# EAGLE board mrShark 09 (EAGLE 6.3)
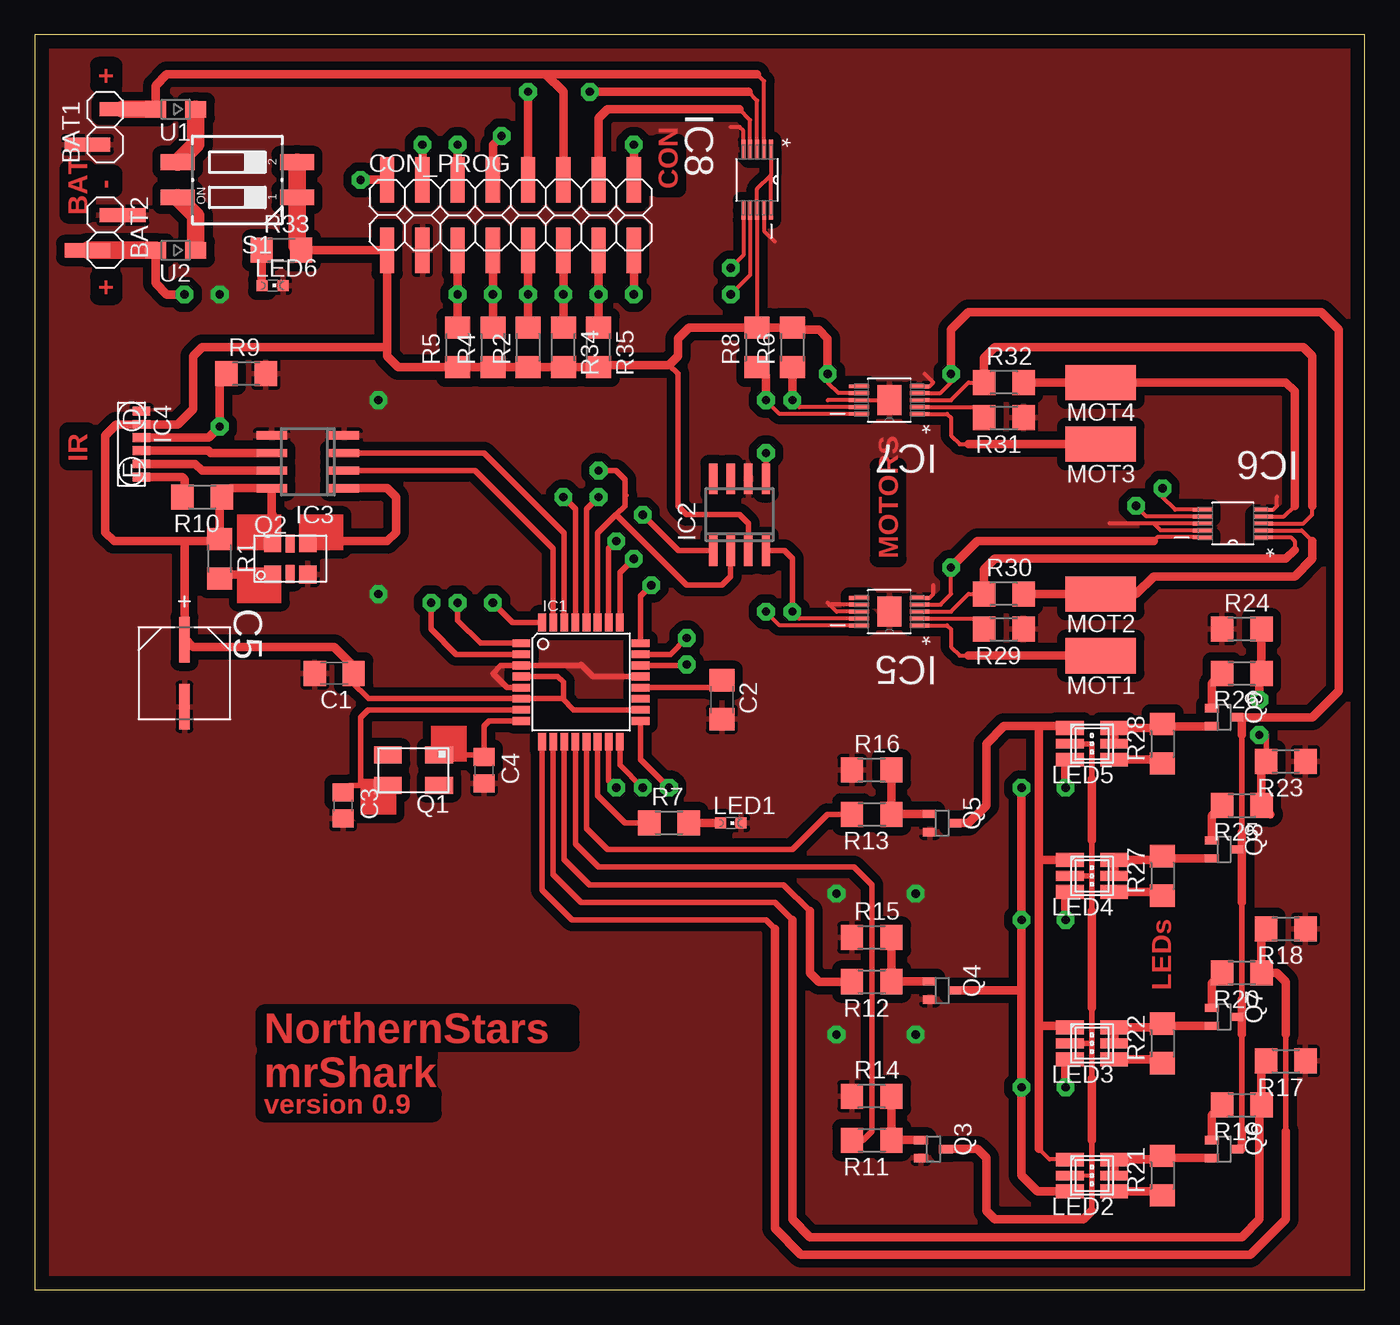
[diagram p0: board, top side]
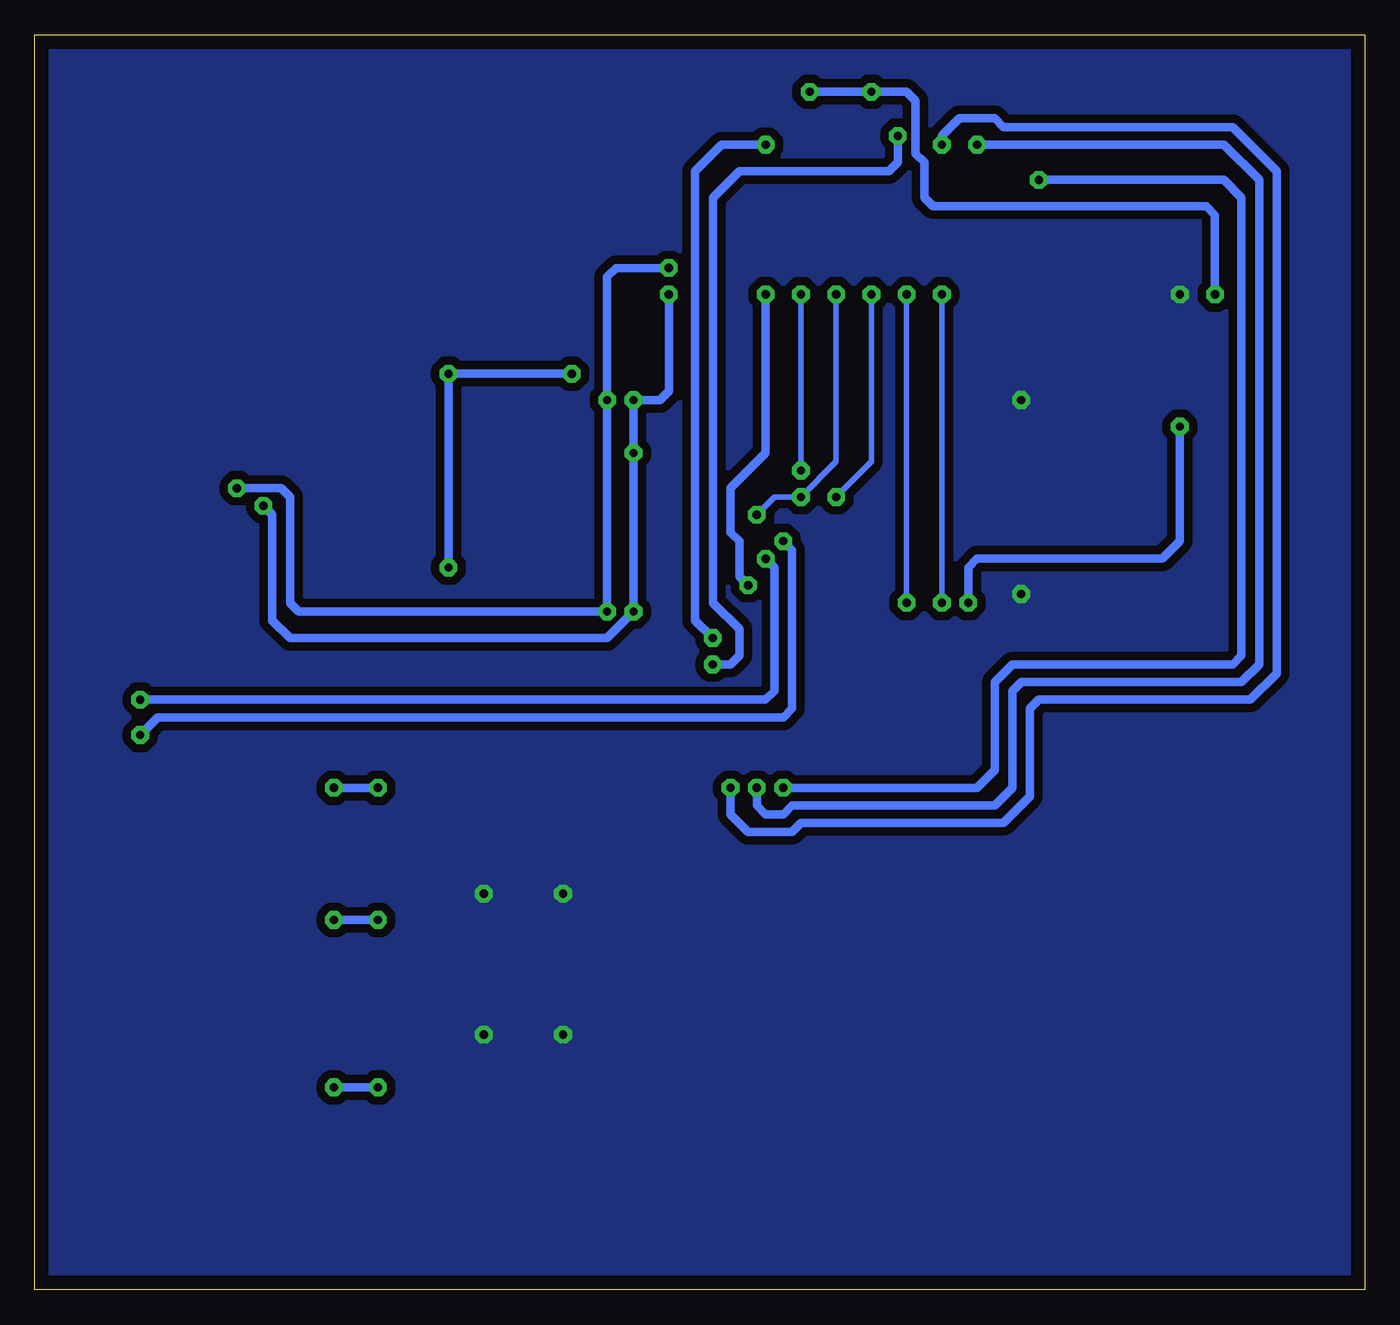
[diagram p1: board, bottom side, seen from below]

Size 95.86 x 90.47 mm. Coordinates in mm from the lower left corner, seen from the top.
Outline: 0,0 95.86,0 95.86,90.47 0,90.47 0,0
Copper layers (1*16): Top 0.035mm / dielectric 1.5mm / Bottom 0.035mm
Design rules "default": minimum track width 10mil, minimum drill 24mil, track to track 1mil, track to pad 1mil, pad to pad 1mil, via to via 1mil, smd to smd 1mil, copper to edge 40mil, drill to drill 8mil, minimum pad ring 10mil, minimum via ring 8mil, stop-mask expansion 4mil, vias tented up to drill 0mil, thermal gap 10mil

## Footprints (pad centres in the part's own frame; a part is rotated, then mirrored left to right if it is on the bottom)
1X02SMD = smd 1.016 x 3.302: 1 -1.27,1.27; 2 1.27,-1.27
C1206 = smd 1.6 x 1.8: 1 -1.4,0; 2 1.4,0
C0805 = smd 1.3 x 1.5: 1 -0.95,0; 2 0.95,0
CAPAE660X800N = smd 3.251 x 0.762: 1 -2.413,0; 2 2.413,0
2X08SMD = smd 1.016 x 3.302: 1 -1.27,-3.81; 2 -1.27,1.27; 3 1.27,-3.81; 4 1.27,1.27; 5 3.81,-3.81; 6 3.81,1.27; 7 6.35,-3.81; 8 6.35,1.27; 9 8.89,-3.81; 10 8.89,1.27; 11 11.43,-3.81; 12 11.43,1.27; 13 13.97,-3.81; 14 13.97,1.27; 15 16.51,-3.81; 16 16.51,1.27
TQFP32-08 = smd 1.27 x 0.559: 1 -4.293,2.8; 2 -4.293,2; 3 -4.293,1.2; 4 -4.293,0.4; 5 -4.293,-0.4; 6 -4.293,-1.2; 7 -4.293,-2; 8 -4.293,-2.8; 17 4.293,-2.8; 18 4.293,-2; 19 4.293,-1.2; 20 4.293,-0.4; 21 4.293,0.4; 22 4.293,1.2; 23 4.293,2; 24 4.293,2.8 | smd 0.559 x 1.27: 9 -2.8,-4.293; 10 -2,-4.293; 11 -1.2,-4.293; 12 -0.4,-4.293; 13 0.4,-4.293; 14 1.2,-4.293; 15 2,-4.293; 16 2.8,-4.293; 25 2.8,4.293; 26 2,4.293; 27 1.2,4.293; 28 0.4,4.293; 29 -0.4,4.293; 30 -1.2,4.293; 31 -2,4.293; 32 -2.8,4.293
SO8 = smd 0.6 x 2.2: 1 -1.905,-2.6; 2 -0.635,-2.6; 3 0.635,-2.6; 4 1.905,-2.6; 5 1.905,2.6; 6 0.635,2.6; 7 -0.635,2.6; 8 -1.905,2.6
SO-08 = smd 0.6 x 2.2: 1 -1.905,-2.6; 2 -0.635,-2.6; 3 0.635,-2.6; 4 1.905,-2.6; 5 1.905,2.6; 6 0.635,2.6; 7 -0.635,2.6; 8 -1.905,2.6
TFBS4711 = smd 0.635 x 1.27: 1 2.37,0.72; 2 1.42,0.72; 3 0.47,0.72; 4 -0.48,0.72; 5 -1.43,0.72; 6 -2.38,0.72
SOP65P640X110-15N = smd 1.422 x 0.279: 1 -2.184,0.991; 2 -2.184,0.508; 3 -2.184,0; 4 -2.184,-0.508; 5 -2.184,-0.991; 6 2.184,-0.991; 7 2.184,-0.508; 8 2.184,0; 9 2.184,0.508; 10 2.184,0.991 | smd 1.727 x 2.184: 11 0,0
SOP50P490X110-10N = smd 1.397 x 0.279: 1 -2.184,0.991; 2 -2.184,0.508; 3 -2.184,0; 4 -2.184,-0.508; 5 -2.184,-0.991; 6 2.184,-0.991; 7 2.184,-0.508; 8 2.184,0; 9 2.184,0.508; 10 2.184,0.991
CHIPLED_0603 = smd 0.8 x 0.8: A 0,-0.75; C 0,0.75
PLCC6K = smd 2 x 1: 1 1.6,-1.15; 3 1.6,1.15; 4 -1.6,1.15; 6 -1.6,-1.15 | smd 2 x 0.7: 2 1.6,0; 5 -1.6,0
SMD2,54-5,08 = smd 2.54 x 5.08: 1 0,0
TXC_7B_SERIES = smd 2 x 1.2: 1 -1.85,-1.1; 2 1.85,-1.1; 3 1.85,1.1; 4 -1.85,1.1
HC536 = smd 1.24 x 1.29: 1 -1.27,-1.125; 2 1.27,-1.125; 3 1.27,1.125; 4 -1.27,1.125 | smd 0.64 x 1.29: TP1 0,1.1; TP2 0,-1.1
SOT323-BEC = smd 0.6 x 1: B -0.65,-0.9; C 0,0.9; E 0.65,-0.9
R1206 = smd 1.6 x 1.803: 1 -1.422,0; 2 1.422,0
CTS-219-02 = smd 1.13 x 2.44: 1 -1.27,-4.3; 2 1.27,-4.3; 3 1.27,4.3; 4 -1.27,4.3
SOD323-W = smd 1.5 x 1.2: A 1.45,0; C -1.45,0

## Placement (x,y rotation side)
BAT1  [1X02SMD]  5.08,83.82 90 top
BAT2  [1X02SMD]  5.08,76.2 270 top
C1  100n  [C1206]  21.59,44.45 180 top
C2  100n  [C1206]  49.53,42.55 270 top
C3  18p  [C0805]  22.23,34.92 270 top
C4  18p  [C0805]  32.38,37.47 270 top
C5  220UF  [CAPAE660X800N]  10.79,44.45 270 top
CON_PROG  7852-16-00-00  [2X08SMD]  26.67,78.74 0 top
IC1  ATMEGA168V-10MU  [TQFP32-08]  39.37,43.81 0 top
IC2  PCA9540SO8  [SO8]  50.8,55.88 0 top
IC3  TIR1000PSR  [SO-08]  19.68,59.69 90 top
IC4  TFBS4711TR1  [TFBS4711]  6.99,60.96 270 top
IC5  DRV8830DRCT  [SOP65P640X110-15N]  61.59,48.9 180 top
IC6  LTC2990IMS#PBF  [SOP50P490X110-10N]  86.36,55.24 180 top
IC7  DRV8830DRCT  [SOP65P640X110-15N]  61.59,64.14 180 top
IC8  LTC2990IMS#PBF  [SOP50P490X110-10N]  52.07,80.01 270 top
LED1  green  [CHIPLED_0603]  50.16,33.66 270 top
LED2  ASMT-YTD2-0BB02  [PLCC6K]  76.2,8.26 180 top
LED3  ASMT-YTD2-0BB02  [PLCC6K]  76.2,17.78 180 top
LED4  ASMT-YTD2-0BB02  [PLCC6K]  76.2,29.84 180 top
LED5  ASMT-YTD2-0BB02  [PLCC6K]  76.2,39.37 180 top
LED6  red  [CHIPLED_0603]  17.14,72.39 270 top
MOT1  [SMD2,54-5,08]  76.83,45.72 90 top
MOT2  [SMD2,54-5,08]  76.83,50.16 90 top
MOT3  [SMD2,54-5,08]  76.83,60.96 90 top
MOT4  [SMD2,54-5,08]  76.83,65.41 90 top
Q1  TXC-7B-SERIESSMD  [TXC_7B_SERIES]  27.3,37.47 180 top
Q2  FXO-HC536R-1.8432  [HC536]  18.41,52.7 0 top
Q3  BC817W  [SOT323-BEC]  64.77,10.16 270 top
Q4  BC817W  [SOT323-BEC]  65.41,21.59 270 top
Q5  BC817W  [SOT323-BEC]  65.41,33.66 270 top
Q6  BC817W  [SOT323-BEC]  85.72,10.16 270 top
Q7  BC817W  [SOT323-BEC]  85.72,19.68 270 top
Q8  BC817W  [SOT323-BEC]  85.72,31.75 270 top
Q9  BC817W  [SOT323-BEC]  85.72,41.27 270 top
R1  100k  [R1206]  13.34,52.7 270 top
R2  100k  [R1206]  35.56,67.94 90 top
R4  100k  [R1206]  33.02,67.94 90 top
R5  100k  [R1206]  30.48,67.94 90 top
R6  1k8  [R1206]  54.61,67.94 90 top
R7  130R  [R1206]  45.72,33.66 0 top
R8  1k8  [R1206]  52.07,67.94 90 top
R9  100k  [R1206]  15.24,66.04 0 top
R10  27R  [R1206]  12.06,57.15 180 top
R11  1k  [R1206]  60.33,10.79 180 top
R12  1k  [R1206]  60.33,22.23 180 top
R13  1k  [R1206]  60.33,34.29 180 top
R14  100k  [R1206]  60.33,13.97 0 top
R15  100k  [R1206]  60.33,25.4 0 top
R16  100k  [R1206]  60.33,37.47 0 top
R17  100k  [R1206]  90.17,16.51 180 top
R18  100k  [R1206]  90.17,26.04 180 top
R19  1k  [R1206]  87,13.34 180 top
R20  1k  [R1206]  87,22.86 180 top
R21  82R  [R1206]  81.28,8.26 90 top
R22  82R  [R1206]  81.28,17.78 90 top
R23  100k  [R1206]  90.17,38.1 180 top
R24  100k  [R1206]  87,47.62 0 top
R25  1k  [R1206]  87,34.92 180 top
R26  1k  [R1206]  87,44.45 180 top
R27  82R  [R1206]  81.28,29.84 90 top
R28  82R  [R1206]  81.28,39.37 90 top
R29  0.95R  [R1206]  69.85,47.62 180 top
R30  0R2  [R1206]  69.85,50.16 0 top
R31  0.95R  [R1206]  69.85,62.87 180 top
R32  0R2  [R1206]  69.85,65.41 0 top
R33  130R  [R1206]  17.78,74.93 0 top
R34  1k8  [R1206]  38.1,67.94 270 top
R35  1k8  [R1206]  40.64,67.94 270 top
S1  219-02  [CTS-219-02]  14.61,80.01 90 top
U1  PMEG2010EAW  [SOD323-W]  10.16,85.09 180 top
U2  PMEG2010EAW  [SOD323-W]  10.16,74.93 180 top

## Library data of the parts
BAT1 BAT2 CON_PROG = pinhead-2
C1-C4 R1 R2 R4-R35 = rcl
C5 = Panasonic-EEEFK_EEEFP; MPN: EEE-FK1C221XP; OC_FARNELL: 1850103; OC_NEWARK: 23T0845; PACKAGE: CASE-D8; SUPPLIER: PANASONIC; TOLERANCE: ±20 %; VOLTAGERATING: 16V
IC1 = atmega8
IC2 = nxp
IC3 = texas
IC4 = vishay
IC5 IC7 = texas; MPN: DRV8830DGQR; OC_FARNELL: 1863106; OC_NEWARK: 58T1482; PACKAGE: MSOP-10; SUPPLIER: TEXAS INSTRUMENTS
IC6 IC8 = linear-technology; DESCRIPTION: I2C Temperature, Voltage and Current Monitor; MPN: LTC2990IMS#PBF; OC_FARNELL: 1898629; OC_NEWARK: 13T3889; PACKAGE: MSOP-10; SUPPLIER: Linear Technology
LED1-LED6 = led
MOT1-MOT4 = wirepad
Q1 Q2 = crystal
Q3-Q9 = transistor-npn
S1 = switch-dil
U1 U2 = diode

## Nets
ADC7: CON_PROG.8 IC1.22
BAT1+: BAT1.2 CON_PROG.12 IC8.2 U1.A
BAT2+: BAT2.2 CON_PROG.10 IC8.3 U2.A
CLK: IC3.1 Q2.3
COLOR_B: LED2.1 LED3.1 LED4.1 LED5.1 Q5.C
COLOR_G: LED2.2 LED3.2 LED4.2 LED5.2 Q3.C
COLOR_R: LED2.3 LED3.3 LED4.3 LED5.3 Q4.C
GND: BAT1.1 BAT2.1 C1.2 C2.2 C3.2 C4.2 C5.2 CON_PROG.3 IC1.3 IC1.5 IC1.21 IC2.6 IC3.4 IC3.5 IC4.6 IC5.5 IC5.7 IC5.8 IC5.11 IC6.5 IC6.8 IC6.9 IC7.5 IC7.8 IC7.11 IC8.5 IC8.9 LED1.C LED6.C Q2.2 Q3.E Q4.E Q5.E R9.2 R14.1 R15.1 R16.1 R17.1 R18.1 R23.1 R24.1 R29.1 R31.1
I2C_ADC: CON_PROG.14 IC8.4
INT0: CON_PROG.7 IC1.32 R4.2
INT1: CON_PROG.5 IC1.1 R5.2
IR_SD: IC1.2 IC4.4 R9.1
IRDA: IC4.1 R10.2
LED1: IC1.10 R17.2 R19.1
LED2: IC1.9 R18.2 R20.1
LED3: IC1.26 R23.2 R25.1
LED4: IC1.25 R24.2 R26.1
LED_B: IC1.13 R13.2
LED_G: IC1.12 R11.2
LED_R: IC1.11 R12.2
MISO: CON_PROG.4 IC1.16
MOSI: CON_PROG.2 IC1.15
N$1: IC5.1 MOT1.1
N$2: IC5.2 R29.2
N$3: IC1.14 R7.1
N$4: Q2.1 R1.2
N$5: LED2.4 R21.1
N$6: IC7.1 MOT3.1
N$7: IC7.2 R31.2
N$8: LED1.A R7.2
N$9: S1.3 U1.C
N$10: LED4.4 R27.1
N$11: LED4.5 LED4.6 Q8.E R27.2
N$12: S1.4 U2.C
N$13: C3.1 IC1.7 Q1.3
N$14: C4.1 IC1.8 Q1.1
N$15: LED3.4 R22.1
N$16: LED3.5 LED3.6 Q7.E R22.2
N$19: Q7.B R20.2
N$20: LED5.4 R28.1
N$22: LED5.5 LED5.6 Q9.E R28.2
N$23: Q9.B R26.2
N$24: Q8.B R25.2
N$25: Q6.B R19.2
N$26: C2.1 IC1.20
N$27: LED2.5 LED2.6 Q6.E R21.2
N$28: LED6.A R33.1
RESET: CON_PROG.9 IC1.29 R2.2
RSCL: CON_PROG.11 IC1.28 IC2.1 R34.1
RSDA: CON_PROG.13 IC1.27 IC2.2 R35.1
RXD: IC1.30 IC3.3
RXIR: IC3.6 IC4.3
SCK: CON_PROG.6 IC1.17
SCL: IC2.5 IC5.10 IC6.7 IC7.10 IC8.7 R8.1
SDA: IC2.4 IC5.9 IC6.6 IC7.9 IC8.6 R6.1
SENS_MOTL1: IC5.3 IC6.1 R30.1
SENS_MOTL2: IC6.2 MOT2.1 R30.2
SENS_MOTR1: IC6.3 IC7.3 R32.1
SENS_MOTR2: IC6.4 MOT4.1 R32.2
SRXD: CON_PROG.16 IC1.23
STXD: CON_PROG.15 IC1.24
TXD: IC1.31 IC3.2
TXIR: IC3.7 IC4.2
VCC: C1.1 C5.1 CON_PROG.1 IC1.4 IC1.6 IC1.18 IC2.3 IC3.8 IC4.5 IC5.4 IC6.10 IC7.4 IC7.7 IC8.1 IC8.8 IC8.10 Q2.4 Q6.C Q7.C Q8.C Q9.C R1.1 R2.1 R4.1 R5.1 R6.2 R8.2 R10.1 R33.2 R34.2 R35.2 S1.1 S1.2
X1: Q5.B R13.1 R16.2
X2: Q4.B R12.1 R15.2
X3: Q3.B R11.1 R14.2

## Tracks (layer width: path | path; a pad name or v marks a point on that pad's centre or on a via)
ADC7  (via drill 0.6 pad 1.27)
  Top 0.406: IC1.22 46.92,45.02 v46.99,45.09
  Top 0.61: CON_PROG.8 33.02,82.55 v33.66,83.19
  Bottom 0.61: v33.66,83.19 33.66,81.28 34.29,80.64 45.09,80.64 46.99,78.74 46.99,49.53 45.09,47.62 45.09,45.72 45.72,45.09 v46.99,45.09
BAT1+
  Top 0.305: IC8.2 52.58,87.12 52.07,87.63
  Top 0.61: U1.A 8.71,86.81 9.53,87.63 36.83,87.63 | 36.83,87.63 38.1,86.36 CON_PROG.12 | 52.07,87.63 36.83,87.63
  Top 1.27: BAT1.2 U1.A
BAT2+  (via drill 0.6 pad 1.27)
  Top 0.305: IC8.3 52.07,85.72 51.44,86.36
  Top 0.61: 51.44,86.36 v40.01,86.36 | v35.56,86.36 CON_PROG.10 | U2.A 8.71,72.57 9.53,71.75 v10.79,71.75
  Top 1.27: U2.A BAT2.2
  Bottom 0.61: v10.79,71.75 10.79,77.47 11.43,78.11 31.11,78.11 31.75,78.74 31.75,81.28 32.38,81.92 32.38,85.72 33.02,86.36 v35.56,86.36 v40.01,86.36
CLK
  Top 0.61: IC3.1 25.4,57.78 26.04,57.15 26.04,54.61 25.4,53.98 19.83,53.98 Q2.3
COLOR_B
  Top 0.305: LED2.1 73.14,9.4 72.39,10.16 | 74.48,19.05 LED3.1 | 74.48,40.64 LED5.1
  Top 0.61: Q5.C 67.31,33.66 68.58,34.92 68.58,39.37 69.85,40.64 72.39,40.64 | 72.39,10.16 72.39,19.05 | 72.39,19.05 72.39,31.11 | 72.39,31.11 72.39,40.64 | LED4.1 72.51,31 72.39,31.11 | 74.48,19.05 72.39,19.05 | 74.48,40.64 72.39,40.64
COLOR_G
  Top 0.305: LED2.2 76.2,8.26
  Top 0.406: 76.2,5.71 76.2,8.26 76.2,10.79 | LED3.2 76.2,17.78 | 76.2,17.78 76.2,15.24 | LED4.2 76.2,29.84 | 76.2,29.84 76.2,27.3 | 76.2,20.32 76.2,17.78 | LED5.2 76.2,39.37 76.2,36.83 | 76.2,32.38 76.2,29.84
  Top 0.61: Q3.C 67.94,10.16 68.58,9.53 68.58,5.71 69.22,5.08 75.56,5.08 76.2,5.71 | 76.2,15.24 76.2,10.79 | 76.2,27.3 76.2,20.32 | 76.2,36.83 76.2,32.38
COLOR_R  (via drill 0.6 pad 1.27)
  Top 0.61: LED2.3 72.27,7.11 71.12,8.26 v71.12,14.61 71.12,21.59 | 71.12,21.59 v71.12,26.67 v71.12,36.2 | v74.3,36.2 74.3,37.91 LED5.3 | LED4.3 74.3,28.39 v74.3,26.67 | LED3.3 74.3,16.32 v74.3,14.61 | Q4.C 71.12,21.59
  Bottom 0.61: v71.12,36.2 v74.3,36.2 | v74.3,26.67 v71.12,26.67 | v74.3,14.61 v71.12,14.61
GND  (via drill 0.6 pad 1.27)
  Top 0.305: IC5.7 57.28,49.4 | 57.28,49.4 57.15,49.53 | IC5.8 57.78,48.9 57.28,49.4 | IC5.5 64.49,49.89 64.77,50.16 64.77,50.8 | 57.15,64.14 IC7.8 IC7.11 | IC7.5 64.49,65.13 64.77,65.41 64.14,66.04 | IC8.5 51.08,83.54 50.8,83.82 50.16,83.82 | IC8.9 52.58,76.33 53.34,75.56 | IC6.8 80.64,55.24 | 80.64,55.24 77.47,55.24 | IC6.9 81.15,54.74 80.64,55.24 | IC6.5 89.26,56.24 89.53,56.52 89.53,57.15
  Top 0.406: IC1.5 34.05,43.41 33.02,44.45 33.59,45.02 IC1.3 39.3,45.02 39.37,45.09 40.24,44.22 IC1.21
  other vias: 13.34,71.75 24.77,50.16 57.78,28.57 63.5,28.57 63.5,18.41 57.78,18.41 24.77,64.14
  pour Bottom (isolate 0.61): 0,0 0,90.81 95.89,90.81 95.89,0
  pour Top (isolate 0.61): 0,0 0,90.81 95.89,90.81 95.89,0
I2C_ADC
  Top 0.305: IC8.4 51.56,84.33 50.8,85.09
  Top 0.61: 50.8,85.09 41.27,85.09 40.64,84.45 CON_PROG.14
INT0  (via drill 0.6 pad 1.27)
  Top 0.406: IC1.32 34.44,48.11 v33.02,49.53
  Top 0.61: CON_PROG.7 v33.02,71.75 R4.2
  Bottom 0.406: v33.02,49.53 v33.02,71.75
INT1  (via drill 0.6 pad 1.27)
  Top 0.406: v30.48,49.53 30.48,48.26 32.12,46.62 IC1.1
  Top 0.61: CON_PROG.5 v30.48,71.75 R5.2
  Bottom 0.406: v30.48,71.75 v30.48,49.53
IR_SD  (via drill 0.6 pad 1.27)
  Top 0.406: IC1.2 30.39,45.81 28.57,47.62 v28.57,49.53
  Top 0.61: IC4.4 12.54,61.44 v13.34,62.23 13.34,65.56 R9.1
  Bottom 0.61: v28.57,49.53 28.57,52.07 27.94,52.7 14.61,52.7 13.34,53.98 v13.34,62.23
IRDA
  Top 0.61: IC4.1 10.62,58.59 10.79,58.42 10.79,57.3 R10.2
LED1
  Top 0.406: IC1.10 37.37,29.94 39.37,27.94 53.34,27.94 54.61,26.67
  Top 0.61: 54.61,26.67 54.61,5.08 55.88,3.81 87,3.81 88.27,5.08 88.27,13.18 R19.1 88.42,16.18 R17.2
LED2
  Top 0.406: IC1.9 36.57,28.84 38.73,26.67 52.7,26.67 53.34,26.04 | 90.17,18.41 90.17,11.43
  Top 0.61: 53.34,26.04 53.34,4.45 55.24,2.54 87.63,2.54 90.17,5.08 90.17,11.43 | 90.17,18.41 90.17,22.23 89.53,22.86 R20.1 88.42,25.7 R18.2
LED3  (via drill 0.6 pad 1.27)
  Top 0.406: IC1.26 41.37,53.44 v41.91,53.98 | v88.27,40.01 88.75,40.01 R23.2
  Top 0.61: 88.27,34.77 R25.1 | 89.05,34.29 R25.1 | R25.1 88.42,37.77 R23.2
  Bottom 0.61: v41.91,53.98 41.27,53.34 41.27,41.91 41.91,41.27 87,41.27 v88.27,40.01
LED4  (via drill 0.6 pad 1.27)
  Top 0.406: IC1.25 42.17,51.7 v43.18,52.7
  Top 0.61: R24.2 R26.1 88.27,44.3 v88.27,42.55
  Bottom 0.61: v43.18,52.7 42.55,52.07 42.55,43.18 43.18,42.55 v88.27,42.55
LED_B
  Top 0.406: IC1.13 39.77,33.26 41.27,31.75 54.61,31.75 57.15,34.29 R13.2
LED_G
  Top 0.406: R11.2 59.69,10.79 60.33,11.43 60.33,29.21 59.05,30.48 40.64,30.48 38.97,32.15 IC1.12
LED_R
  Top 0.406: IC1.11 38.17,31.05 40.01,29.21 53.98,29.21 55.88,27.3
  Top 0.61: 55.88,27.3 55.88,22.86 56.52,22.23 R12.2
MISO  (via drill 0.6 pad 1.27)
  Top 0.406: IC1.16 42.17,37.84 v43.81,36.2
  Top 0.61: v27.94,82.55 CON_PROG.4
  Bottom 0.61: v43.81,36.2 43.81,34.92 43.18,34.29 41.91,34.29 41.27,34.92 26.67,34.92 25.4,36.2 25.4,43.18 24.77,43.81 8.89,43.81 7.62,45.09 7.62,80.01 10.16,82.55 v27.94,82.55
MOSI  (via drill 0.6 pad 1.27)
  Top 0.406: IC1.15 41.37,36.73 v41.91,36.2
  Top 0.61: v23.5,80.01 CON_PROG.2
  Bottom 0.61: v41.91,36.2 27.94,36.2 26.67,37.47 26.67,43.81 25.4,45.09 9.53,45.09 8.89,45.72 8.89,78.74 10.16,80.01 v23.5,80.01
N$1
  Top 0.305: IC5.1 65.76,47.9 66.04,47.62 66.04,46.35 66.67,45.72 67.31,45.72
  Top 0.61: 67.31,45.72 MOT1.1
N$2
  Top 0.305: IC5.2 67.67,48.39 R29.2
N$3
  Top 0.406: IC1.14 40.57,35.63 42.55,33.66 R7.1
  Top 0.61: 44.23,33.59 R7.1
N$4
  Top 0.61: Q2.1 13.63,51.58 R1.2
N$5
  Top 0.61: LED2.4 81.01,7.11 R21.1
N$6
  Top 0.305: IC7.1 65.76,63.14 66.04,62.87 66.04,61.59 66.67,60.96 67.31,60.96
  Top 0.61: MOT3.1 67.31,60.96
N$7
  Top 0.305: IC7.2 67.67,63.63 R31.2
N$8
  Top 0.61: R7.2 LED1.A
N$9
  Top 1.27: U1.C 11.61,82.58 S1.3
N$10
  Top 0.61: LED4.4 81.01,28.7 R27.1
N$11
  Top 0.61: LED4.5 LED4.6 81.01,31 R27.2 81.45,31.1 Q8.E
N$12
  Top 1.27: U2.C 11.61,77.44 S1.4
N$13
  Top 0.406: IC1.7 24.04,41.81 23.5,41.27 23.5,36.37 | Q1.3 23.5,36.37 | 23.5,36.37 22.71,36.37 C3.1
N$14
  Top 0.406: Q1.1 32.23,38.56 C4.1 32.38,40.64 32.76,41.02 IC1.8
N$15
  Top 0.61: LED3.4 81.01,16.63 R22.1
N$16
  Top 0.61: LED3.5 LED3.6 81.01,18.93 R22.2 81.45,19.04 Q7.E
N$19
  Top 0.61: Q7.B 84.83,22.11 R20.2
N$20
  Top 0.61: LED5.4 81.01,38.22 R28.1
N$22
  Top 0.61: LED5.5 LED5.6 81.01,40.52 R28.2 81.45,40.62 Q9.E
N$23
  Top 0.61: Q9.B 84.83,43.7 R26.2
N$24
  Top 0.61: Q8.B 84.83,34.18 R25.2
N$25
  Top 0.61: Q6.B 84.83,12.59 R19.2
N$26
  Top 0.406: IC1.20 49,43.41 C2.1
N$27
  Top 0.61: LED2.5 LED2.6 81.01,9.4 R21.2 81.45,9.51 Q6.E
N$28
  Top 0.61: R33.1 16.36,72.43 LED6.A
RESET  (via drill 0.6 pad 1.27)
  Top 0.406: IC1.29 38.97,56.28 v38.1,57.15
  Top 0.61: CON_PROG.9 v35.56,71.75 R2.2
  Bottom 0.406: v38.1,57.15 35.56,59.69 v35.56,71.75
RSCL  (via drill 0.6 pad 1.27)
  Top 0.406: IC1.28 39.77,56.28 v40.64,57.15 | IC2.1 46.41,53.28 v43.81,55.88
  Top 0.61: CON_PROG.11 v38.1,71.75 R34.1
  Bottom 0.406: v38.1,71.75 38.1,59.69 v40.64,57.15 42.55,57.15 v43.81,55.88
RSDA  (via drill 0.6 pad 1.27)
  Top 0.305: 42.66,57.27 42.55,57.15
  Top 0.406: IC1.27 40.57,54.54 41.91,55.88 | 41.91,55.88 42.55,56.52 42.55,57.15 42.55,58.42 41.91,59.05 v40.64,59.05 | IC2.2 50.16,51.44 49.53,50.8 46.99,50.8 41.91,55.88
  Top 0.61: CON_PROG.13 v40.64,71.75 R35.1
  Bottom 0.406: v40.64,59.05 v40.64,71.75
RXD
  Top 0.406: IC1.30 38.17,54.54 32.38,60.33 IC3.3
RXIR
  Top 0.61: IC3.6 12.7,60.33 12.54,60.49 IC4.3
SCK  (via drill 0.6 pad 1.27)
  Top 0.406: IC1.17 43.66,38.25 v45.72,36.2
  Top 0.61: v30.48,82.55 CON_PROG.6
  Bottom 0.61: v30.48,82.55 30.48,83.19 29.21,84.45 26.67,84.45 26.04,83.82 9.53,83.82 6.35,80.64 6.35,44.45 8.26,42.55 23.5,42.55 24.13,41.91 24.13,35.56 26.04,33.66 40.64,33.66 41.27,33.02 44.45,33.02 45.72,34.29 v45.72,36.2
SCL  (via drill 0.6 pad 1.27)
  Top 0.305: IC5.10 53.7,47.9 v52.7,48.9 | IC7.10 53.7,63.14 v52.7,64.14 | IC6.7 80.14,55.75 v79.38,56.52 | IC8.7 51.56,73.15 v50.16,71.75
  Top 0.406: IC2.5 v52.7,60.33
  Top 0.61: v52.7,64.14 52.7,65.89 R8.1
  Bottom 0.61: v79.38,56.52 78.74,55.88 78.74,48.26 77.47,46.99 54.61,46.99 v52.7,48.9 v52.7,60.33 v52.7,64.14 50.8,64.14 50.16,64.77 v50.16,71.75
SDA  (via drill 0.6 pad 1.27)
  Top 0.305: IC5.9 55.12,48.39 v54.61,48.9 | IC7.9 55.12,63.63 v54.61,64.14 | IC6.6 82.19,56.24 81.28,57.15 v81.28,57.78 | IC8.6 51.08,74.57 v50.16,73.66
  Top 0.406: IC2.4 54.03,53.28 54.61,52.7 v54.61,48.9
  Top 0.61: v54.61,64.14 R6.1
  Bottom 0.61: v81.28,57.78 78.11,57.78 77.47,57.15 77.47,49.53 76.83,48.9 v54.61,48.9 v54.61,64.14 54.61,73.03 53.98,73.66 v50.16,73.66
SENS_MOTL1
  Top 0.305: IC5.3 66.04,48.9 67.31,50.16 R30.1 | IC6.1 90.53,54.25 90.81,53.98 90.81,53.34
  Top 0.61: R30.1 68.43,51.92 69.22,52.7 90.17,52.7 90.81,53.34
SENS_MOTL2
  Top 0.305: IC6.2 91.31,54.74 92.08,53.98
  Top 0.61: R30.2 MOT2.1 79.38,50.16 80.64,51.44 90.81,51.44 92.08,52.7 92.08,53.98
SENS_MOTR1
  Top 0.305: IC7.3 66.04,64.14 67.31,65.41 R32.1 | IC6.3 91.44,55.24 92.08,55.88 92.08,56.52
  Top 0.61: 92.08,56.52 92.08,67.31 91.44,67.94 69.22,67.94 68.43,67.16 R32.1
SENS_MOTR2
  Top 0.305: IC6.4 90.04,55.75 90.81,56.52
  Top 0.61: R32.2 MOT4.1 90.17,65.41 90.81,64.77 90.81,56.52
SRXD  (via drill 0.6 pad 1.27)
  Top 0.406: IC1.23 45.81,45.81 v46.99,46.99
  Top 0.61: v43.18,82.55 CON_PROG.16
  Bottom 0.61: v43.18,82.55 46.35,82.55 48.26,80.64 48.26,48.26 v46.99,46.99
STXD  (via drill 0.6 pad 1.27)
  Top 0.406: IC1.24 43.66,50.01 v44.45,50.8
  Top 0.61: CON_PROG.15 v43.18,71.75
  Bottom 0.61: v43.18,71.75 43.18,60.33 45.72,57.78 45.72,54.61 45.09,53.98 45.09,51.44 v44.45,50.8
TXD
  Top 0.406: IC3.2 31.75,59.05 37.37,53.44 IC1.31
TXIR
  Top 0.61: IC4.2 11.58,59.54 12.06,59.05 IC3.7
VCC  (via drill 0.6 pad 1.27)
  Top 0.305: IC5.4 65.28,49.4 66.04,50.16 v66.04,52.07 | v57.15,66.04 57.15,65.41 57.91,64.64 IC7.7 | IC7.4 65.28,64.64 66.04,65.41 v66.04,66.04 | IC6.10 80.92,54.25 80.64,53.98 | R8.2 IC8.8 52.07,79.38 53.06,80.37 | IC8.1 53.06,80.37 | IC8.10 53.06,80.37
  Top 0.406: 87,11.43 87,18.41 | 87,20.95 87,27.94 | 87,33.02 87,40.01 | 22.86,43.81 24.06,42.62 IC1.6 38.03,42.62 | 38.03,42.62 38.83,41.81 IC1.18 | IC1.4 37.7,44.22 38.1,43.81 38.1,42.69 38.03,42.62 | IC2.3 51.44,55.24 50.8,55.88 46.99,55.88 46.35,56.52 46.35,66.04 45.72,66.67 | C5.1 10.79,47.62
  Top 0.61: 80.64,53.98 67.94,53.98 v66.04,52.07 | IC3.8 14.12,57.78 R10.1 13.34,57 R1.1 13.18,53.98 10.79,53.98 | IC3.8 17.09,53.89 Q2.4 | 10.79,53.98 5.71,53.98 5.08,54.61 5.08,61.59 5.88,62.39 IC4.5 10.32,62.39 11.43,63.5 11.43,67.31 12.06,67.94 25.4,67.94 | v57.15,66.04 57.15,68.58 56.52,69.22 54.76,69.22 R6.2 R8.2 47.14,69.37 46.35,68.58 46.35,67.31 45.72,66.67 40.79,66.67 R35.2 R34.2 R2.1 R4.1 R5.1 26.19,66.52 25.4,67.31 25.4,67.94 | 25.4,67.94 CON_PROG.1 R33.2 19.05,74.78 | Q6.C 87,10.16 87,11.43 | 87,18.41 87,19.68 | 87,19.68 87,20.95 | 87,27.94 87,31.75 | 87,31.75 87,33.02 | 87,40.01 87,41.27 Q9.C 92.08,41.27 93.98,43.18 93.98,69.22 92.71,70.48 67.31,70.48 66.04,69.22 v66.04,66.04 | Q8.C 87,31.75 | Q7.C 87,19.68 | IC3.8 17.09,55.94 17.14,55.88 | 22.86,43.81 22.86,44.45 | 22.86,44.45 22.86,45.09 21.59,46.35 11.43,46.35 10.79,46.99 10.79,47.62 10.79,53.98 | C1.1 22.86,44.45
  Top 1.27: S1.2 S1.1 18.91,75.23 R33.2
  Bottom 0.61: v66.04,52.07 v66.04,66.04 v57.15,66.04
X1
  Top 0.61: Q5.B 61.76,34.3 R13.1 R16.2
X2
  Top 0.61: Q4.B 61.76,22.24 R12.1 R15.2
X3
  Top 0.61: Q3.B 61.76,10.81 R11.1 R14.2
(copper drawn outside any net)
  shapes: Top area x5

## Text on the board
Top: + | - | CON | BAT | + | IR | MOTORS | LEDs | NorthernStars | mrShark | version 0.9